# EAGLE board Grapher (EAGLE 5.10)
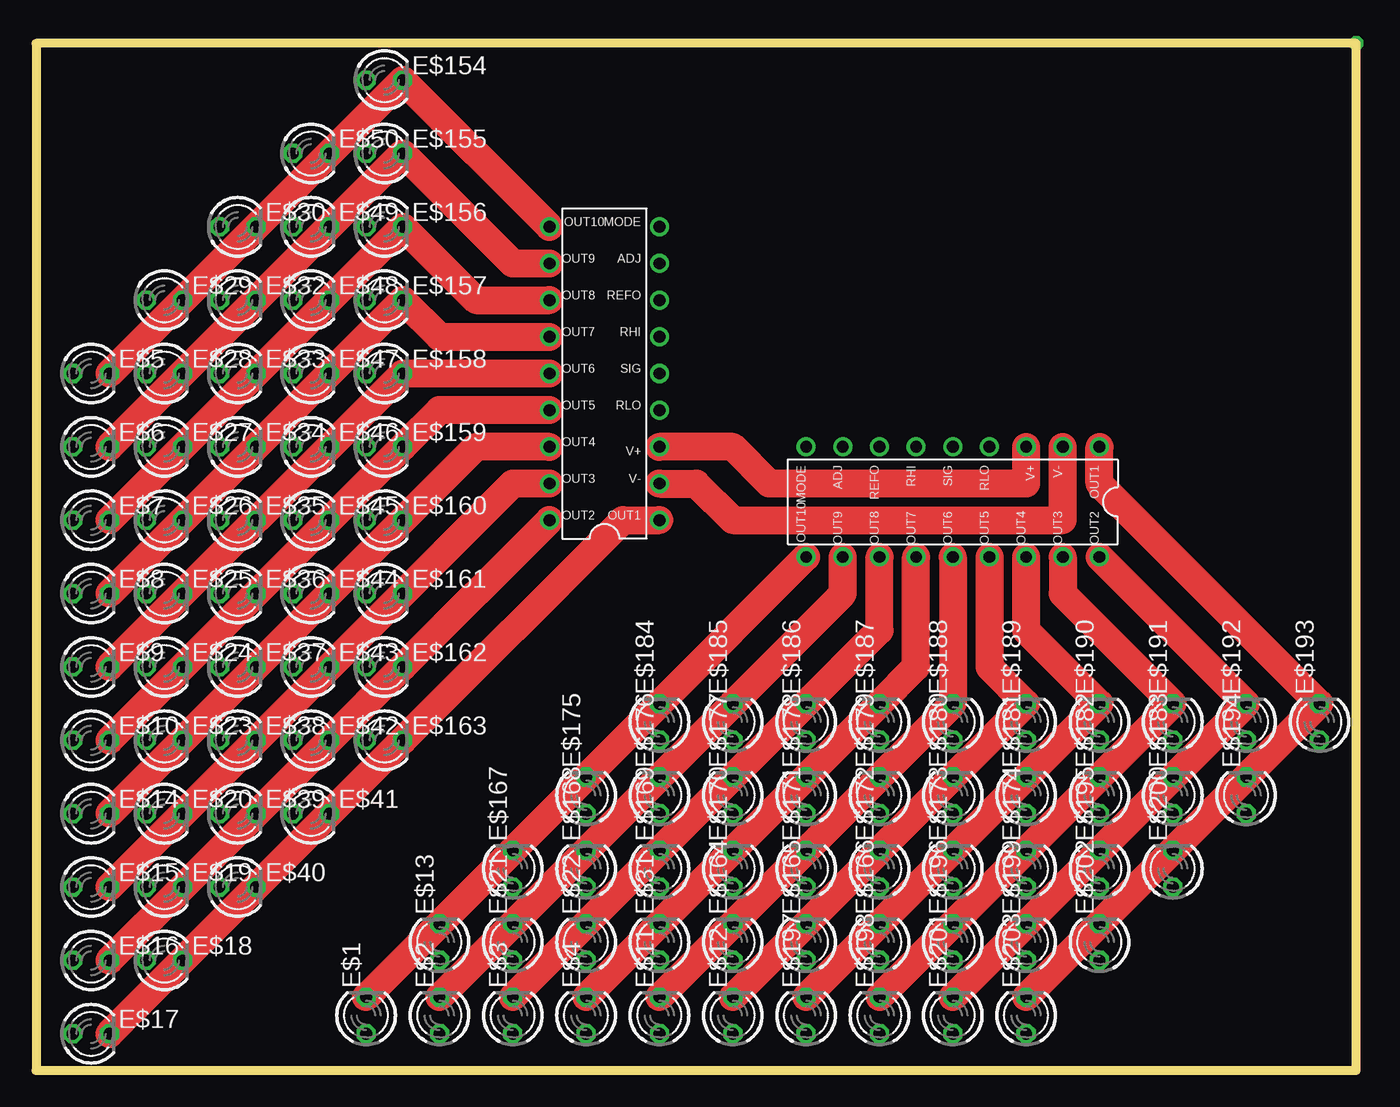
[diagram p0: board, top side]
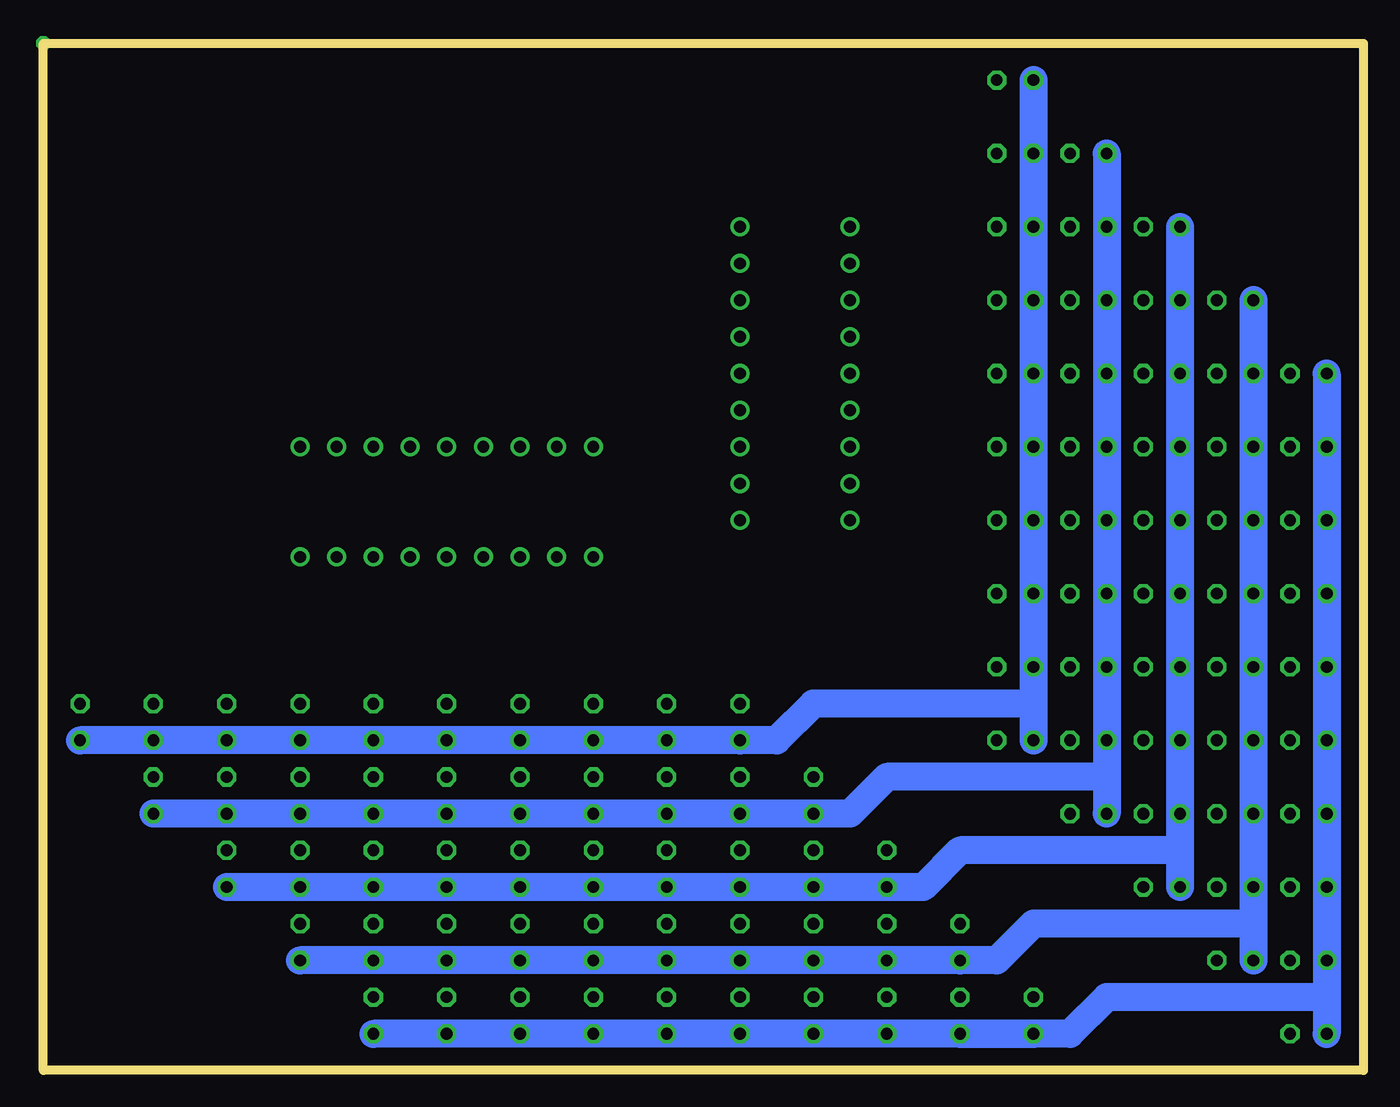
[diagram p1: board, bottom side, seen from below]

Size 91.44 x 71.12 mm. Coordinates in mm from the lower left corner, seen from the top.
Outline: 91.44,0 91.44,71.12 0,71.12 0,0 91.44,0
Copper layers (1*16): Top 0.035mm / dielectric 1.5mm / Bottom 0.035mm
Design rules "default": minimum track width 10mil, minimum drill 24mil, track to track 8mil, track to pad 8mil, pad to pad 8mil, via to via 8mil, smd to smd 8mil, copper to edge 40mil, drill to drill 8mil, minimum pad ring 10mil, minimum via ring 8mil, stop-mask expansion 4mil, vias tented up to drill 0mil, thermal gap 10mil

## Footprints (pad centres in the part's own frame; a part is rotated, then mirrored left to right if it is on the bottom)
LED3MM = drill 0.813 octagon: A -1.27,0; K 1.27,0
LM3914-10LED-BARGRAPH = drill 0.813 round: 1!R -3.81,1.27; 1!S -3.81,3.81; 1Q 3.81,1.27; 2!R -3.81,-3.81; 2!S -3.81,-6.35; 2Q 3.81,-8.89; 2Q1 3.81,-11.43; 2Q3 -3.81,-11.43; 3!R 3.81,-1.27; 3!S 3.81,-3.81; 3Q 3.81,-6.35; 4!R 3.81,3.81; 4!S 3.81,6.35; 4Q -3.81,8.89; GND -3.81,-8.89; NC -3.81,6.35; OE -3.81,-1.27; VCC 3.81,8.89

## Placement (x,y rotation side)
E$1  [LED3MM]  22.86,3.81 90 top
E$2  [LED3MM]  27.94,3.81 90 top
E$3  [LED3MM]  33.02,3.81 90 top
E$4  [LED3MM]  38.1,3.81 90 top
E$5  [LED3MM]  3.81,48.26 0 top
E$6  [LED3MM]  3.81,43.18 0 top
E$7  [LED3MM]  3.81,38.1 0 top
E$8  [LED3MM]  3.81,33.02 0 top
E$9  [LED3MM]  3.81,27.94 0 top
E$10  [LED3MM]  3.81,22.86 0 top
E$11  [LED3MM]  43.18,3.81 90 top
E$12  [LED3MM]  48.26,3.81 90 top
E$13  [LED3MM]  27.94,8.89 90 top
E$14  [LED3MM]  3.81,17.78 0 top
E$15  [LED3MM]  3.81,12.7 0 top
E$16  [LED3MM]  3.81,7.62 0 top
E$17  [LED3MM]  3.81,2.54 0 top
E$18  [LED3MM]  8.89,7.62 0 top
E$19  [LED3MM]  8.89,12.7 0 top
E$20  [LED3MM]  8.89,17.78 0 top
E$21  [LED3MM]  33.02,8.89 90 top
E$22  [LED3MM]  38.1,8.89 90 top
E$23  [LED3MM]  8.89,22.86 0 top
E$24  [LED3MM]  8.89,27.94 0 top
E$25  [LED3MM]  8.89,33.02 0 top
E$26  [LED3MM]  8.89,38.1 0 top
E$27  [LED3MM]  8.89,43.18 0 top
E$28  [LED3MM]  8.89,48.26 0 top
E$29  [LED3MM]  8.89,53.34 0 top
E$30  [LED3MM]  13.97,58.42 0 top
E$31  [LED3MM]  43.18,8.89 90 top
E$32  [LED3MM]  13.97,53.34 0 top
E$33  [LED3MM]  13.97,48.26 0 top
E$34  [LED3MM]  13.97,43.18 0 top
E$35  [LED3MM]  13.97,38.1 0 top
E$36  [LED3MM]  13.97,33.02 0 top
E$37  [LED3MM]  13.97,27.94 0 top
E$38  [LED3MM]  13.97,22.86 0 top
E$39  [LED3MM]  13.97,17.78 0 top
E$40  [LED3MM]  13.97,12.7 0 top
E$41  [LED3MM]  19.05,17.78 0 top
E$42  [LED3MM]  19.05,22.86 0 top
E$43  [LED3MM]  19.05,27.94 0 top
E$44  [LED3MM]  19.05,33.02 0 top
E$45  [LED3MM]  19.05,38.1 0 top
E$46  [LED3MM]  19.05,43.18 0 top
E$47  [LED3MM]  19.05,48.26 0 top
E$48  [LED3MM]  19.05,53.34 0 top
E$49  [LED3MM]  19.05,58.42 0 top
E$50  [LED3MM]  19.05,63.5 0 top
E$51  [LED3MM]  99.06,46.99 90 top  (outside the outline)
E$52  [LED3MM]  104.14,46.99 90 top  (outside the outline)
E$53  [LED3MM]  109.22,46.99 90 top  (outside the outline)
E$54  [LED3MM]  114.3,46.99 90 top  (outside the outline)
E$55  [LED3MM]  119.38,46.99 90 top  (outside the outline)
E$56  [LED3MM]  124.46,46.99 90 top  (outside the outline)
E$57  [LED3MM]  129.54,46.99 90 top  (outside the outline)
E$58  [LED3MM]  134.62,46.99 90 top  (outside the outline)
E$59  [LED3MM]  139.7,46.99 90 top  (outside the outline)
E$60  [LED3MM]  144.78,46.99 90 top  (outside the outline)
E$61  [LED3MM]  99.06,52.07 90 top  (outside the outline)
E$62  [LED3MM]  104.14,52.07 90 top  (outside the outline)
E$63  [LED3MM]  109.22,52.07 90 top  (outside the outline)
E$64  [LED3MM]  114.3,52.07 90 top  (outside the outline)
E$65  [LED3MM]  119.38,52.07 90 top  (outside the outline)
E$66  [LED3MM]  124.46,52.07 90 top  (outside the outline)
E$67  [LED3MM]  129.54,52.07 90 top  (outside the outline)
E$68  [LED3MM]  134.62,52.07 90 top  (outside the outline)
E$69  [LED3MM]  139.7,52.07 90 top  (outside the outline)
E$70  [LED3MM]  144.78,52.07 90 top  (outside the outline)
E$71  [LED3MM]  99.06,57.15 90 top  (outside the outline)
E$72  [LED3MM]  104.14,57.15 90 top  (outside the outline)
E$73  [LED3MM]  109.22,57.15 90 top  (outside the outline)
E$74  [LED3MM]  114.3,57.15 90 top  (outside the outline)
E$75  [LED3MM]  119.38,57.15 90 top  (outside the outline)
E$76  [LED3MM]  124.46,57.15 90 top  (outside the outline)
E$77  [LED3MM]  129.54,57.15 90 top  (outside the outline)
E$78  [LED3MM]  134.62,57.15 90 top  (outside the outline)
E$79  [LED3MM]  139.7,57.15 90 top  (outside the outline)
E$80  [LED3MM]  144.78,57.15 90 top  (outside the outline)
E$81  [LED3MM]  99.06,62.23 90 top  (outside the outline)
E$82  [LED3MM]  104.14,62.23 90 top  (outside the outline)
E$83  [LED3MM]  109.22,62.23 90 top  (outside the outline)
E$84  [LED3MM]  114.3,62.23 90 top  (outside the outline)
E$85  [LED3MM]  119.38,62.23 90 top  (outside the outline)
E$86  [LED3MM]  124.46,62.23 90 top  (outside the outline)
E$87  [LED3MM]  129.54,62.23 90 top  (outside the outline)
E$88  [LED3MM]  134.62,62.23 90 top  (outside the outline)
E$89  [LED3MM]  139.7,62.23 90 top  (outside the outline)
E$90  [LED3MM]  144.78,62.23 90 top  (outside the outline)
E$91  [LED3MM]  99.06,67.31 90 top  (outside the outline)
E$92  [LED3MM]  104.14,67.31 90 top  (outside the outline)
E$93  [LED3MM]  109.22,67.31 90 top  (outside the outline)
E$94  [LED3MM]  114.3,67.31 90 top  (outside the outline)
E$95  [LED3MM]  119.38,67.31 90 top  (outside the outline)
E$96  [LED3MM]  124.46,67.31 90 top  (outside the outline)
E$97  [LED3MM]  129.54,67.31 90 top  (outside the outline)
E$98  [LED3MM]  134.62,67.31 90 top  (outside the outline)
E$99  [LED3MM]  139.7,67.31 90 top  (outside the outline)
E$100  [LED3MM]  144.78,67.31 90 top  (outside the outline)
E$101  [LED3MM]  99.06,6.35 90 top  (outside the outline)
E$102  [LED3MM]  104.14,6.35 90 top  (outside the outline)
E$103  [LED3MM]  109.22,6.35 90 top  (outside the outline)
E$104  [LED3MM]  114.3,6.35 90 top  (outside the outline)
E$105  [LED3MM]  119.38,6.35 90 top  (outside the outline)
E$106  [LED3MM]  124.46,6.35 90 top  (outside the outline)
E$107  [LED3MM]  129.54,6.35 90 top  (outside the outline)
E$108  [LED3MM]  134.62,6.35 90 top  (outside the outline)
E$109  [LED3MM]  139.7,6.35 90 top  (outside the outline)
E$110  [LED3MM]  144.78,6.35 90 top  (outside the outline)
E$111  [LED3MM]  99.06,11.43 90 top  (outside the outline)
E$112  [LED3MM]  104.14,11.43 90 top  (outside the outline)
E$113  [LED3MM]  109.22,11.43 90 top  (outside the outline)
E$114  [LED3MM]  114.3,11.43 90 top  (outside the outline)
E$115  [LED3MM]  119.38,11.43 90 top  (outside the outline)
E$116  [LED3MM]  124.46,11.43 90 top  (outside the outline)
E$117  [LED3MM]  129.54,11.43 90 top  (outside the outline)
E$118  [LED3MM]  134.62,11.43 90 top  (outside the outline)
E$119  [LED3MM]  139.7,11.43 90 top  (outside the outline)
E$120  [LED3MM]  144.78,11.43 90 top  (outside the outline)
E$121  [LED3MM]  99.06,16.51 90 top  (outside the outline)
E$122  [LED3MM]  104.14,16.51 90 top  (outside the outline)
E$123  [LED3MM]  109.22,16.51 90 top  (outside the outline)
E$124  [LED3MM]  114.3,16.51 90 top  (outside the outline)
E$125  [LED3MM]  119.38,16.51 90 top  (outside the outline)
E$126  [LED3MM]  124.46,16.51 90 top  (outside the outline)
E$127  [LED3MM]  129.54,16.51 90 top  (outside the outline)
E$128  [LED3MM]  134.62,16.51 90 top  (outside the outline)
E$129  [LED3MM]  139.7,16.51 90 top  (outside the outline)
E$130  [LED3MM]  144.78,16.51 90 top  (outside the outline)
E$131  [LED3MM]  99.06,21.59 90 top  (outside the outline)
E$132  [LED3MM]  104.14,21.59 90 top  (outside the outline)
E$133  [LED3MM]  109.22,21.59 90 top  (outside the outline)
E$134  [LED3MM]  114.3,21.59 90 top  (outside the outline)
E$135  [LED3MM]  119.38,21.59 90 top  (outside the outline)
E$136  [LED3MM]  124.46,21.59 90 top  (outside the outline)
E$137  [LED3MM]  129.54,21.59 90 top  (outside the outline)
E$138  [LED3MM]  134.62,21.59 90 top  (outside the outline)
E$139  [LED3MM]  139.7,21.59 90 top  (outside the outline)
E$140  [LED3MM]  144.78,21.59 90 top  (outside the outline)
E$141  [LED3MM]  99.06,26.67 90 top  (outside the outline)
E$142  [LED3MM]  104.14,26.67 90 top  (outside the outline)
E$143  [LED3MM]  109.22,26.67 90 top  (outside the outline)
E$144  [LED3MM]  114.3,26.67 90 top  (outside the outline)
E$145  [LED3MM]  119.38,26.67 90 top  (outside the outline)
E$146  [LED3MM]  124.46,26.67 90 top  (outside the outline)
E$147  [LED3MM]  129.54,26.67 90 top  (outside the outline)
E$148  [LED3MM]  134.62,26.67 90 top  (outside the outline)
E$149  [LED3MM]  139.7,26.67 90 top  (outside the outline)
E$150  [LED3MM]  144.78,26.67 90 top  (outside the outline)
E$151  [LM3914-10LED-BARGRAPH]  133.35,39.37 90 top  (outside the outline)
E$152  [LM3914-10LED-BARGRAPH]  110.49,39.37 270 top  (outside the outline)
E$153  [LM3914-10LED-BARGRAPH]  39.37,46.99 180 top
E$154  [LED3MM]  24.13,68.58 0 top
E$155  [LED3MM]  24.13,63.5 0 top
E$156  [LED3MM]  24.13,58.42 0 top
E$157  [LED3MM]  24.13,53.34 0 top
E$158  [LED3MM]  24.13,48.26 0 top
E$159  [LED3MM]  24.13,43.18 0 top
E$160  [LED3MM]  24.13,38.1 0 top
E$161  [LED3MM]  24.13,33.02 0 top
E$162  [LED3MM]  24.13,27.94 0 top
E$163  [LED3MM]  24.13,22.86 0 top
E$164  [LED3MM]  48.26,8.89 90 top
E$165  [LED3MM]  53.34,8.89 90 top
E$166  [LED3MM]  58.42,8.89 90 top
E$167  [LED3MM]  33.02,13.97 90 top
E$168  [LED3MM]  38.1,13.97 90 top
E$169  [LED3MM]  43.18,13.97 90 top
E$170  [LED3MM]  48.26,13.97 90 top
E$171  [LED3MM]  53.34,13.97 90 top
E$172  [LED3MM]  58.42,13.97 90 top
E$173  [LED3MM]  63.5,13.97 90 top
E$174  [LED3MM]  68.58,13.97 90 top
E$175  [LED3MM]  38.1,19.05 90 top
E$176  [LED3MM]  43.18,19.05 90 top
E$177  [LED3MM]  48.26,19.05 90 top
E$178  [LED3MM]  53.34,19.05 90 top
E$179  [LED3MM]  58.42,19.05 90 top
E$180  [LED3MM]  63.5,19.05 90 top
E$181  [LED3MM]  68.58,19.05 90 top
E$182  [LED3MM]  73.66,19.05 90 top
E$183  [LED3MM]  78.74,19.05 90 top
E$184  [LED3MM]  43.18,24.13 90 top
E$185  [LED3MM]  48.26,24.13 90 top
E$186  [LED3MM]  53.34,24.13 90 top
E$187  [LED3MM]  58.42,24.13 90 top
E$188  [LED3MM]  63.5,24.13 90 top
E$189  [LED3MM]  68.58,24.13 90 top
E$190  [LED3MM]  73.66,24.13 90 top
E$191  [LED3MM]  78.74,24.13 90 top
E$192  [LED3MM]  83.82,24.13 90 top
E$193  [LED3MM]  88.9,24.13 90 top
E$194  [LED3MM]  83.82,19.05 90 top
E$195  [LED3MM]  73.66,13.97 90 top
E$196  [LED3MM]  63.5,8.89 90 top
E$197  [LED3MM]  53.34,3.81 90 top
E$198  [LED3MM]  58.42,3.81 90 top
E$199  [LED3MM]  68.58,8.89 90 top
E$200  [LED3MM]  78.74,13.97 90 top
E$201  [LED3MM]  63.5,3.81 90 top
E$202  [LED3MM]  73.66,8.89 90 top
E$203  [LED3MM]  68.58,3.81 90 top
E$204  [LM3914-10LED-BARGRAPH]  64.77,39.37 270 top

## Library data of the parts
E$1-E$150 E$154-E$203 = led
E$151-E$153 E$204 = RussellLibrary

## Nets
S$1: E$153.NC E$204.NC
S$2: E$153.1!S E$204.1!S
S$6: E$16.K E$19.K E$39.K E$42.K E$162.K
S$7: E$17.K E$163.K
S$8: E$15.K E$161.K
S$9: E$14.K E$160.K
S$10: E$10.K E$159.K
S$11: E$9.K E$158.K
S$12: E$8.K E$157.K
S$13: E$7.K E$156.K
S$14: E$6.K E$155.K
S$15: E$5.K E$154.K
S$16: E$1.K E$184.K E$204.2Q1
S$17: E$2.K E$185.K E$204.2Q
S$18: E$3.K E$186.K E$204.3Q
S$19: E$4.K E$187.K E$204.3!S
S$20: E$153.4Q
S$21: E$153.2Q1
S$22: E$11.K E$188.K E$204.3!R
S$23: E$191.K E$198.K E$204.4!S
S$24: E$192.K E$201.K E$204.VCC
S$26: E$193.K E$203.K E$204.4Q
S$27: E$190.K E$197.K E$204.4!R
S$28: E$12.K E$189.K E$204.1Q
S$29: E$153.2Q
S$30: E$153.3Q
S$31: E$153.3!S
S$32: E$153.3!R
S$33: E$153.1Q
S$34: E$153.4!R
S$35: E$153.4!S
S$36: E$153.VCC
S$37: E$154.A E$163.A E$184.A E$193.A
S$38: E$41.A E$50.A E$175.A E$194.A
S$39: E$30.A E$40.A E$167.A E$200.A
S$40: E$13.A E$18.A E$29.A E$202.A
S$41: E$1.A E$5.A E$17.A E$203.A

## Tracks (layer width: path | path; a pad name or v marks a point on that pad's centre or on a via)
S$1
  Top 1.93: E$153.NC 45.72,40.64 48.26,38.1 71.12,38.1 E$204.NC
S$2
  Top 1.93: E$204.1!S 68.58,40.64 50.8,40.64 48.26,43.18 E$153.1!S
S$6
  Top 1.93: E$16.K E$19.K E$39.K E$42.K E$162.K
S$7
  Top 1.93: E$163.K E$17.K
S$8
  Top 1.93: E$161.K E$15.K
S$9
  Top 1.93: E$160.K E$14.K
S$10
  Top 1.93: E$159.K E$10.K
S$11
  Top 1.93: E$158.K E$9.K
S$12
  Top 1.93: E$157.K E$8.K
S$13
  Top 1.93: E$156.K E$7.K
S$14
  Top 1.93: E$155.K E$6.K
S$15
  Top 1.93: E$154.K E$5.K
S$16
  Top 1.93: E$1.K E$184.K E$204.2Q1
S$17
  Top 1.93: E$2.K E$185.K 55.88,33.02 E$204.2Q
S$18
  Top 1.93: E$3.K E$186.K 58.42,30.48 E$204.3Q
S$19
  Top 1.93: E$4.K E$187.K 60.96,27.94 E$204.3!S
S$20
  Top 1.93: 25.4,22.86 40.64,38.1 E$153.4Q
S$21
  Top 1.93: 25.4,68.58 E$153.2Q1
S$22
  Top 1.93: E$11.K E$188.K E$204.3!R
S$23
  Top 1.93: E$198.K E$191.K 71.12,33.02 E$204.4!S
S$24
  Top 1.93: E$201.K E$192.K E$204.VCC
S$25  (via drill 0.6)
  other vias: 91.44,71.12
S$26
  Top 1.93: E$203.K E$193.K 73.66,40.64 E$204.4Q
S$27
  Top 1.93: E$197.K E$190.K 68.58,30.48 E$204.4!R
S$28
  Top 1.93: E$12.K E$189.K 66.04,27.94 E$204.1Q
S$29
  Top 1.93: 25.4,63.5 33.02,55.88 E$153.2Q
S$30
  Top 1.93: 25.4,58.42 30.48,53.34 E$153.3Q
S$31
  Top 1.93: 25.4,53.34 27.94,50.8 E$153.3!S
S$32
  Top 1.93: E$153.3!R 25.4,48.26
S$33
  Top 1.93: E$153.1Q 27.94,45.72 25.4,43.18
S$34
  Top 1.93: E$153.4!R 30.48,43.18 25.4,38.1
S$35
  Top 1.93: E$153.4!S 33.02,40.64 25.4,33.02
S$36
  Top 1.93: E$153.VCC 25.4,27.94
S$37
  Bottom 1.93: E$154.A 22.86,25.4 | 22.86,25.4 E$163.A | 22.86,25.4 38.1,25.4 40.64,22.86 E$184.A E$193.A
S$38
  Bottom 1.93: E$50.A 17.78,20.32 | 17.78,20.32 E$41.A | 17.78,20.32 33.02,20.32 35.56,17.78 E$175.A E$194.A
S$39
  Bottom 1.93: E$30.A 12.7,15.24 | 12.7,15.24 E$40.A | 12.7,15.24 27.94,15.24 30.48,12.7 E$167.A E$200.A
S$40
  Bottom 1.93: E$29.A 7.62,10.16 | 7.62,10.16 E$18.A | 7.62,10.16 22.86,10.16 25.4,7.62 E$13.A E$202.A
S$41
  Bottom 1.93: E$5.A E$17.A | 2.54,5.08 17.78,5.08 20.32,2.54 E$1.A | E$1.A E$203.A | 27.94,2.54 E$1.A